# Altium PCB Top_Cell.PcbDoc
Units mm, origin at the board's own origin, x right, y up, seen from the top; angles counter-clockwise.
Board outline 257.2 x 79.09 mm, 4 copper layers (L1, L2, L3, L4), stack 0.603 mm thick; 25 components, 6 nets, 71 pads, 0 vias.
Unrouted connection lines stored in the file: 19.
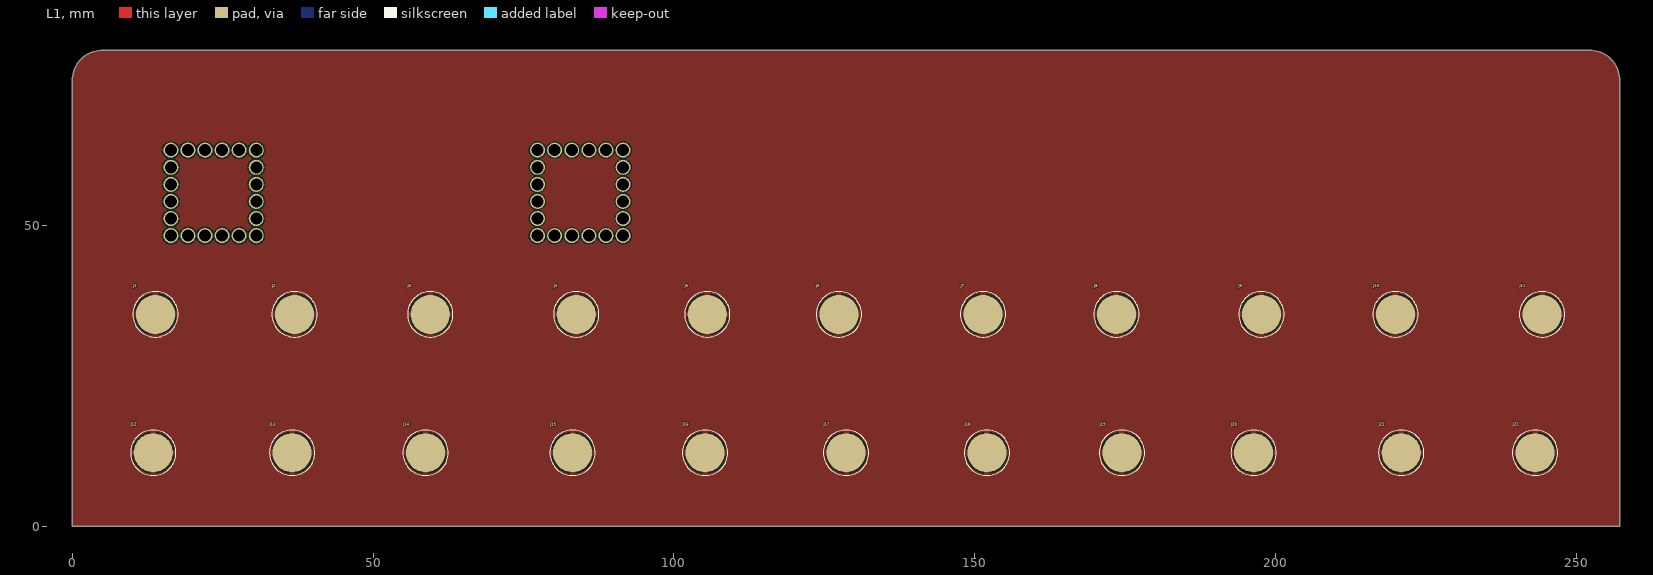
[diagram p0: L1 view]
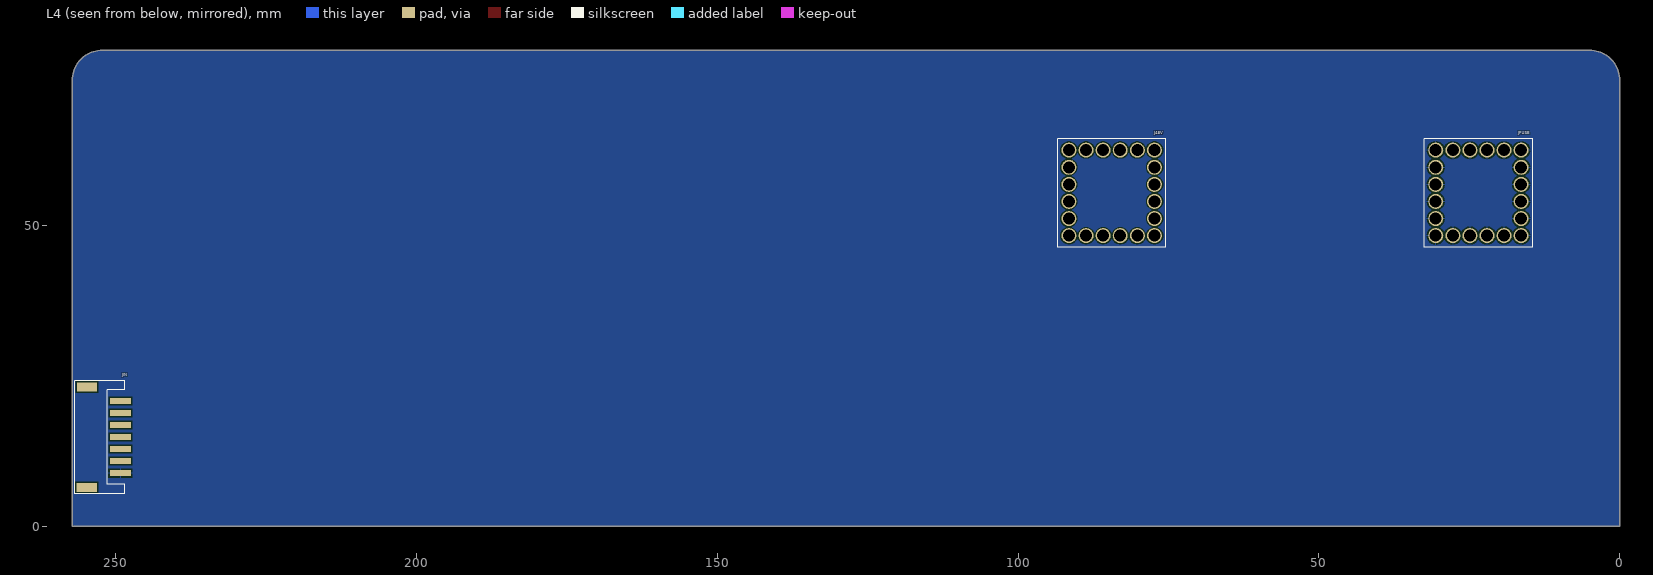
[diagram p1: L4 view, seen from below]
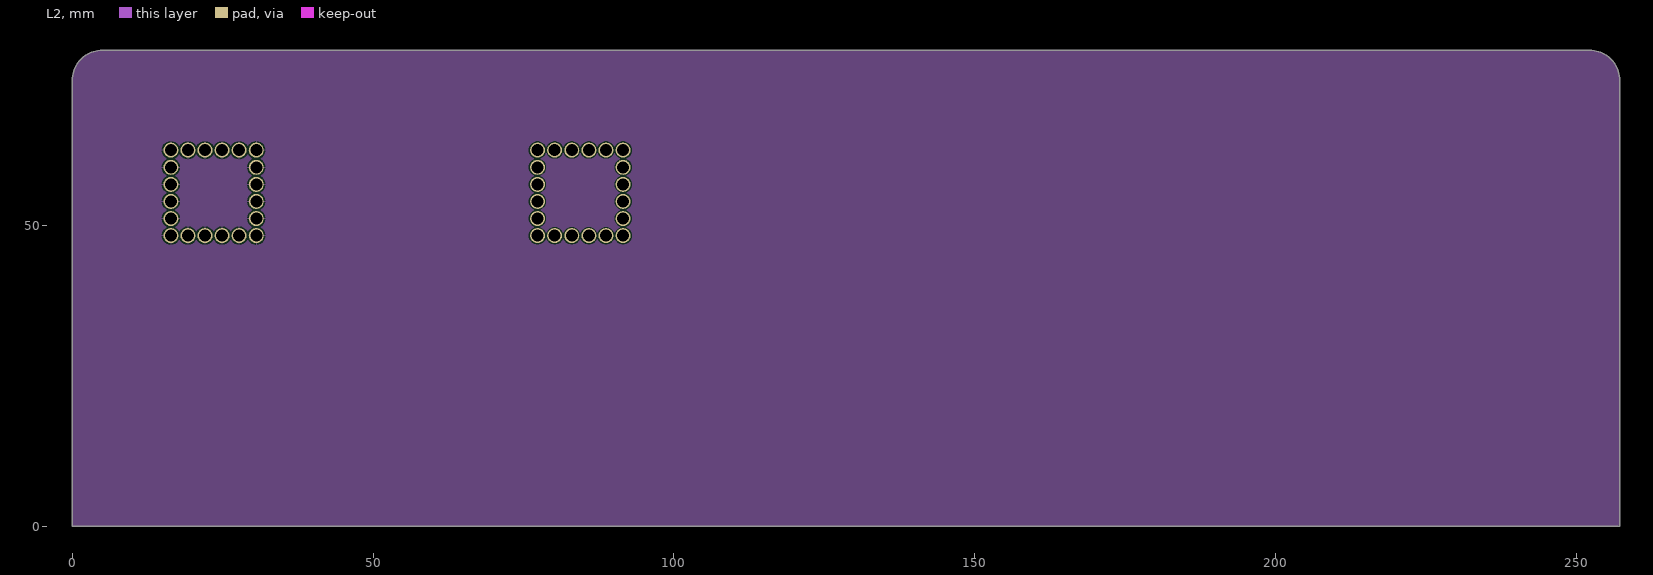
[diagram p2: L2]

## Layer stack, top to bottom
Top Solder: solder mask 0.0102, Solder Resist, Dk 3.5
L1: signal copper 0.0356
Dielectric 2: prepreg 0.0711, PP-006, Dk 4.1
L2: signal copper 0.035
Dielectric 1: dielectric 0.32, FR-4, Dk 4.8
L3: signal copper 0.035
Dielectric 3: prepreg 0.0711, PP-006, Dk 4.1
L4: signal copper 0.0356
Bottom Solder: solder mask 0.0102, Solder Resist, Dk 3.5

## Board outline
0,0 257.2,0 257.2,74.095 ccw(c252.2,74.095) 252.2,79.095 5,79.095 ccw(c5,74.095) 0,74.095

## Design rules (kind name [scope] priority, off if disabled: settings)
Clearance [All] p1: gap=0.2 ignorepadtopadclearanceinfootprint=FALSE except(0: Arc-Hole Track-Hole SMDPad-Hole THPad-Hole Via-Hole Fill-Hole Poly-Hole Region-Hole Text-Hole)
Height [All] p1: minheight=0 maxheight=60 prefheight=15
HoleSize [All] p1: absolutevalues=TRUE maxlimit=6 minlimit=0.2 maxpercent=80.000 minpercent=20.000
HoleToHoleClearance [All] p1: gap=0.15 allowstackedmicrovias=TRUE
MinimumSolderMaskSliver [All] p1: minsoldermaskwidth=0.15
PolygonConnect [All] p1: connectstyle=Relief reliefconductorwidth=0.254 reliefentries=4 polygonreliefangle="90 Angle" airgapwidth=0.254
RoutingVias [All] p1: holewidth=0.3 width=0.6 viastyle="Through Hole" minholewidth=0.2 minwidth=0.46 maxholewidth=3 maxwidth=3
SilkToSilkClearance [All] p1: silktosilkclearance=0.15
SilkToSolderMaskClearance [IsPad] p1: minsilkscreentomaskgap=0.15 clearancetoexposedcopper=TRUE
SolderMaskExpansion [All] p1: expansion=0.102 istentingtop=TRUE
Width [All] p1: maxlimit=5 minlimit=0.2 preferedwidth=0.3
24 further rules are at their usual default settings.

## Components (designator, comment, footprint, x,y, rotation, side; value= is the part's Value field where it differs from the comment)
J1 "2036-3-57-15-00-00-03-0" "6mm Pad" 13.83,35.2 r0 top
J2 "2036-3-57-15-00-00-03-0" "6mm Pad" 36.944,35.2 r0 top
J3 "2036-3-57-15-00-00-03-0" "6mm Pad" 59.502,35.2 r0 top
J4 "2036-3-57-15-00-00-03-0" "6mm Pad" 83.767,35.2 r0 top
J5 "2036-3-57-15-00-00-03-0" "6mm Pad" 105.542,35.2 r0 top
J6 "2036-3-57-15-00-00-03-0" "6mm Pad" 127.419,35.2 r0 top
J7 "2036-3-57-15-00-00-03-0" "6mm Pad" 151.379,35.2 r0 top
J8 "2036-3-57-15-00-00-03-0" "6mm Pad" 173.553,35.2 r0 top
J9 "2036-3-57-15-00-00-03-0" "6mm Pad" 197.645,35.2 r0 top
J10 "2036-3-57-15-00-00-03-0" "6mm Pad" 219.918,35.2 r0 top
J11 "2036-3-57-15-00-00-03-0" "6mm Pad" 244.3,35.2 r0 top
J12 "2036-3-57-15-00-00-03-0" "6mm Pad" 13.459,12.2 r0 top
J13 "2036-3-57-15-00-00-03-0" "6mm Pad" 36.543,12.2 r0 top
J14 "2036-3-57-15-00-00-03-0" "6mm Pad" 58.717,12.2 r0 top
J15 "2036-3-57-15-00-00-03-0" "6mm Pad" 83.147,12.2 r0 top
J16 "2036-3-57-15-00-00-03-0" "6mm Pad" 105.174,12.2 r0 top
J17 "2036-3-57-15-00-00-03-0" "6mm Pad" 128.615,12.2 r0 top
J18 "2036-3-57-15-00-00-03-0" "6mm Pad" 152.027,12.2 r0 top
J19 "2036-3-57-15-00-00-03-0" "6mm Pad" 174.468,12.2 r0 top
J20 "2036-3-57-15-00-00-03-0" "6mm Pad" 196.352,12.2 r0 top
J21 "2036-3-57-15-00-00-03-0" "6mm Pad" 220.881,12.2 r0 top
J22 "2036-3-57-15-00-00-03-0" "6mm Pad" 243.126,12.2 r0 top
J48V "S98979" S98979 84.442,55.385 r180 bottom
JFUSE "S98979" S98979 23.482,55.385 r180 bottom
JIN "S7B-PH-SM4-TB(LF)(SN)" JST-PH-S7 249.2,14.797 r90 bottom

## Footprints (in the part's own frame and the unit in brackets; to place one, negate y for a bottom-side part, rotate by r counter-clockwise, add the part's x,y. Pads: shape width x height; smd on the part's side, far side on the other; paste and mask are expansions set on the pad)
"6mm Pad" [mm] "Pad, 6mm"
  round 6.5 smd mask+0.508: 1(0,0)
  silkscreen extent -3.78,-3.77 3.78,3.77, body extent -3,-3 3,3, height 1.4
JST-PH-S7 [mm] "Locking Connector; Side-Entry; Header; 7-Pin, 2mm pitch"
  rect 1x3.5 smd: 1(-6,0) 2(-4,0) 3(-2,0) 4(0,0) 5(2,0) 6(4,0) 7(6,0)
  rect 1.5x3.4 smd: 8(-8.382,5.588) 9(8.35,5.55)
  silkscreen extent -9.4,-0.76 9.4,7.62, body extent -8.95,-1.49 8.95,7.11, height 5.5
S98979 [mm] "20 Pin Shank Terminal M8 Through Hole"
  round 2.5 hole 2: 1(-7.1,-7.1) 1(-7.1,-4.26) 1(-7.1,-1.42) 1(-7.1,1.42) 1(-7.1,4.26) 1(-7.1,7.1) 1(-4.26,-7.1) 1(-4.26,7.1) 1(-1.42,-7.1) 1(-1.42,7.1) 1(1.42,-7.1) 1(1.42,7.1) 1(4.26,-7.1) 1(4.26,7.1) 1(7.1,-7.1) 1(7.1,-4.26) 1(7.1,-1.42) 1(7.1,1.42) 1(7.1,4.26) 1(7.1,7.1)
  silkscreen extent -9,-9 9,9, body extent -7.7,-7.7 7.7,7.7, height 31.5

## Part data
J1 J2 J3 J4 J5 J6 J7 J8 J9 J10 J11 J12 J13 J14 J15 J16 J17 J18 J19 J20 J21 J22: "Hardware, Sprint Contact Surface", Supplier Part Number 1=54-2036-3-57-15-00-00-03-0CT-ND, Supplier 1=Digi-Key
J48V JFUSE: "Screw Terminal M8, 360A", Supplier Part Number 1=2101-S98979-ND, Supplier 1=Digi-Key
JIN: "Header, JST, 7-Pin, Right-Angle, PH, Surface Mount", Supplier Part Number 1=455-1754-1-ND, Category=J, Supplier 1=Digi-Key

## Nets (pads, with @x,y where several pads share a name; then routed paths per layer and width w, separated by ;. In a path a pad name is that pad's centre, name@x,y a point inside that pad or via, vN(x,y) a via of type N, cw(c..) or ccw(c..) an arc to the next point about the centre after c; other vN are vias at no path point)
SCL_IN: JIN.5
SDA_IN: JIN.4
ST_CH_IN: JIN.2
ST_DIS_IN: JIN.3
VNEG: J1.1 J2.1 J3.1 J4.1 J5.1 J6.1 J7.1 J8.1 J9.1 J10.1 J11.1 J12.1 J13.1 J14.1 J15.1 J16.1 J17.1 J18.1 J19.1 J20.1 J21.1 J22.1 JFUSE.1 JIN.1
VO: J48V.1
pads on no net: JIN.6 JIN.7 JIN.8 JIN.9

## Polygon pours and split planes (outlines as drawn)
VNEG on L1 "VNEG_L01_P003" (solid, pour order 3): 257.2,0.378 256.822,0 0,0 0,74.095 cw(c5,74.095) 5,79.095 252.2,79.095 cw(c252.2,74.125) 257.17,74.125 257.17,74.043
VNEG on L1 "VNEG_L01_P001" (solid, pour order 1): 257.2,0.378 256.822,0 0,0 0,74.095 cw(c5,74.095) 5,79.095 252.2,79.095 cw(c252.2,74.125) 257.17,74.125 257.17,74.043
VNEG on L2 "VNEG_L02_P000" (solid, pour order 0): 257.2,0.378 256.822,0 0,0 0,74.095 cw(c5,74.095) 5,79.095 252.2,79.095 cw(c252.2,74.125) 257.17,74.125 257.17,74.043
VNEG on L4 "VNEG_L04_P002" (solid, pour order 2): 257.2,0.378 256.822,0 0,0 0,74.095 cw(c5,74.095) 5,79.095 252.2,79.095 cw(c252.2,74.125) 257.17,74.125 257.17,74.043

## Silkscreen, mask and mechanical layers (free items; w line width, h text height)
Mechanical 1:
  drawing of 160 lines, arcs and shapes, not listed